# Altium PCB Car Power Supply v2 Big.PcbDoc
Units mm, origin at the board's own origin, x right, y up, seen from the top; angles counter-clockwise.
Board outline 152.4 x 101.6 mm, 2 copper layers (Top Layer, Bottom Layer); 25 components, 12 nets, 53 pads, 4 vias.
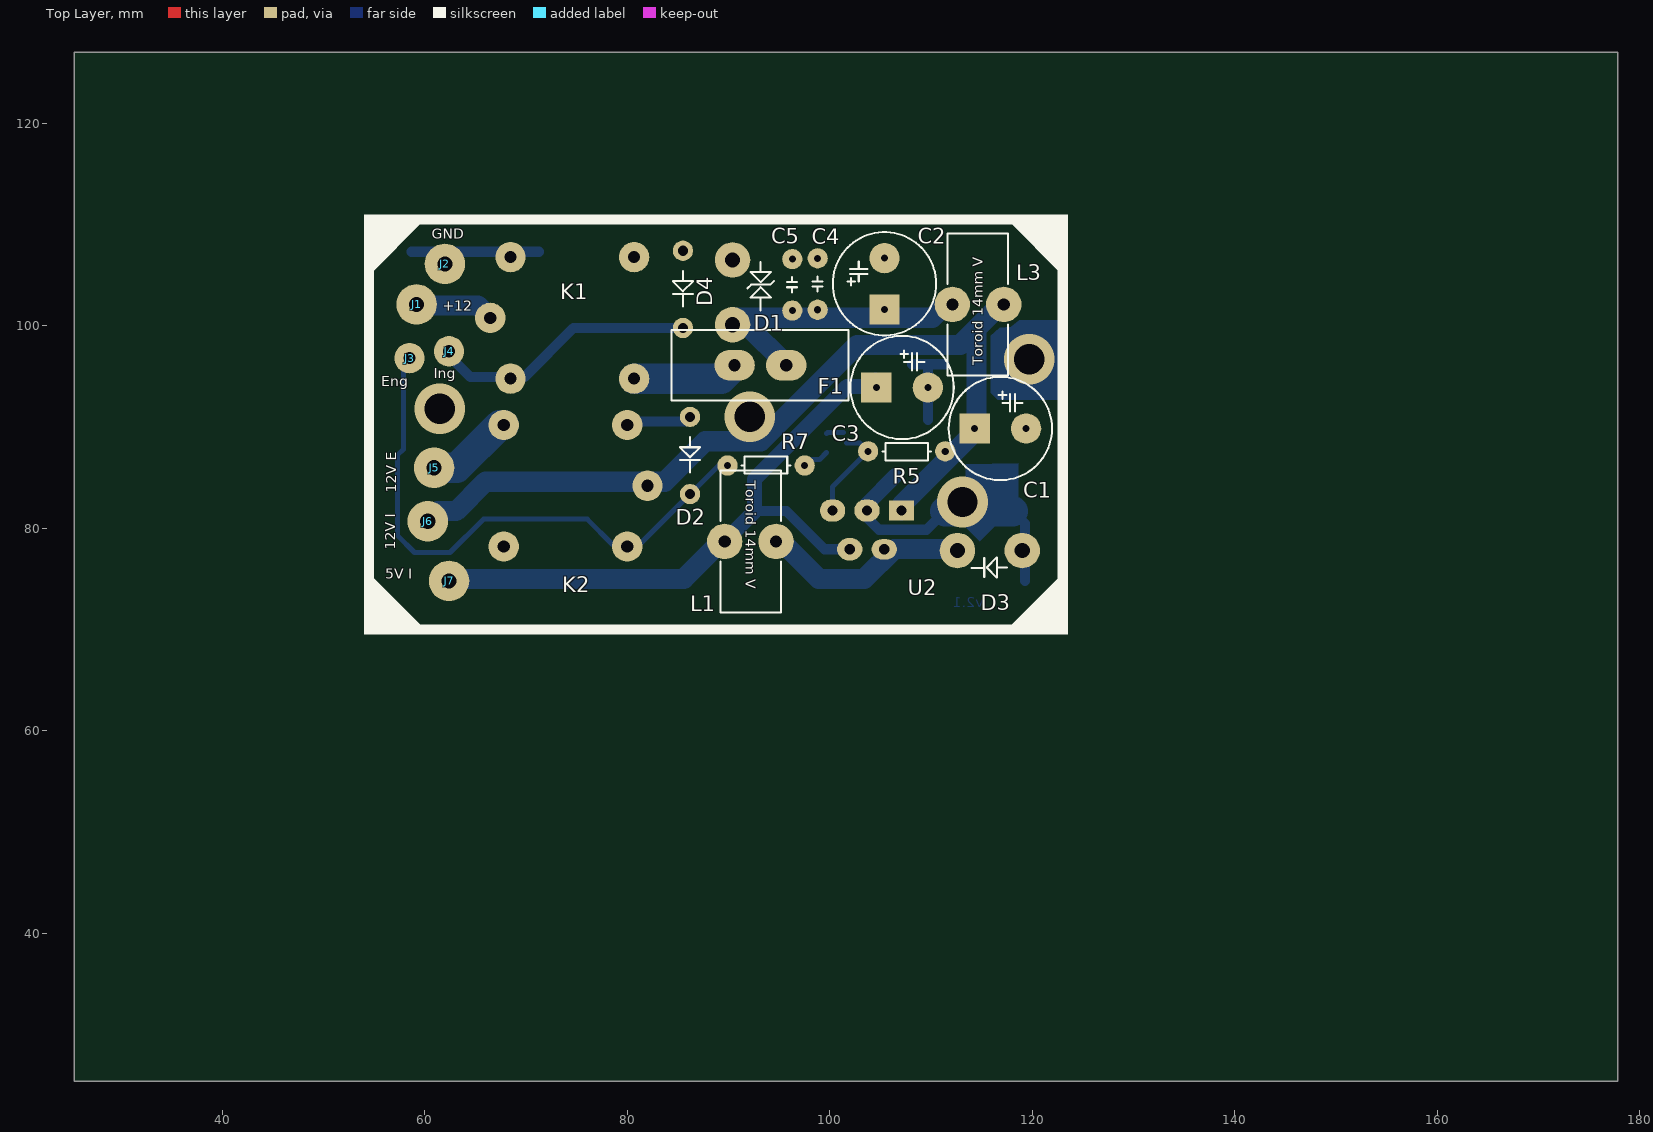
[diagram p0: Top Layer view]
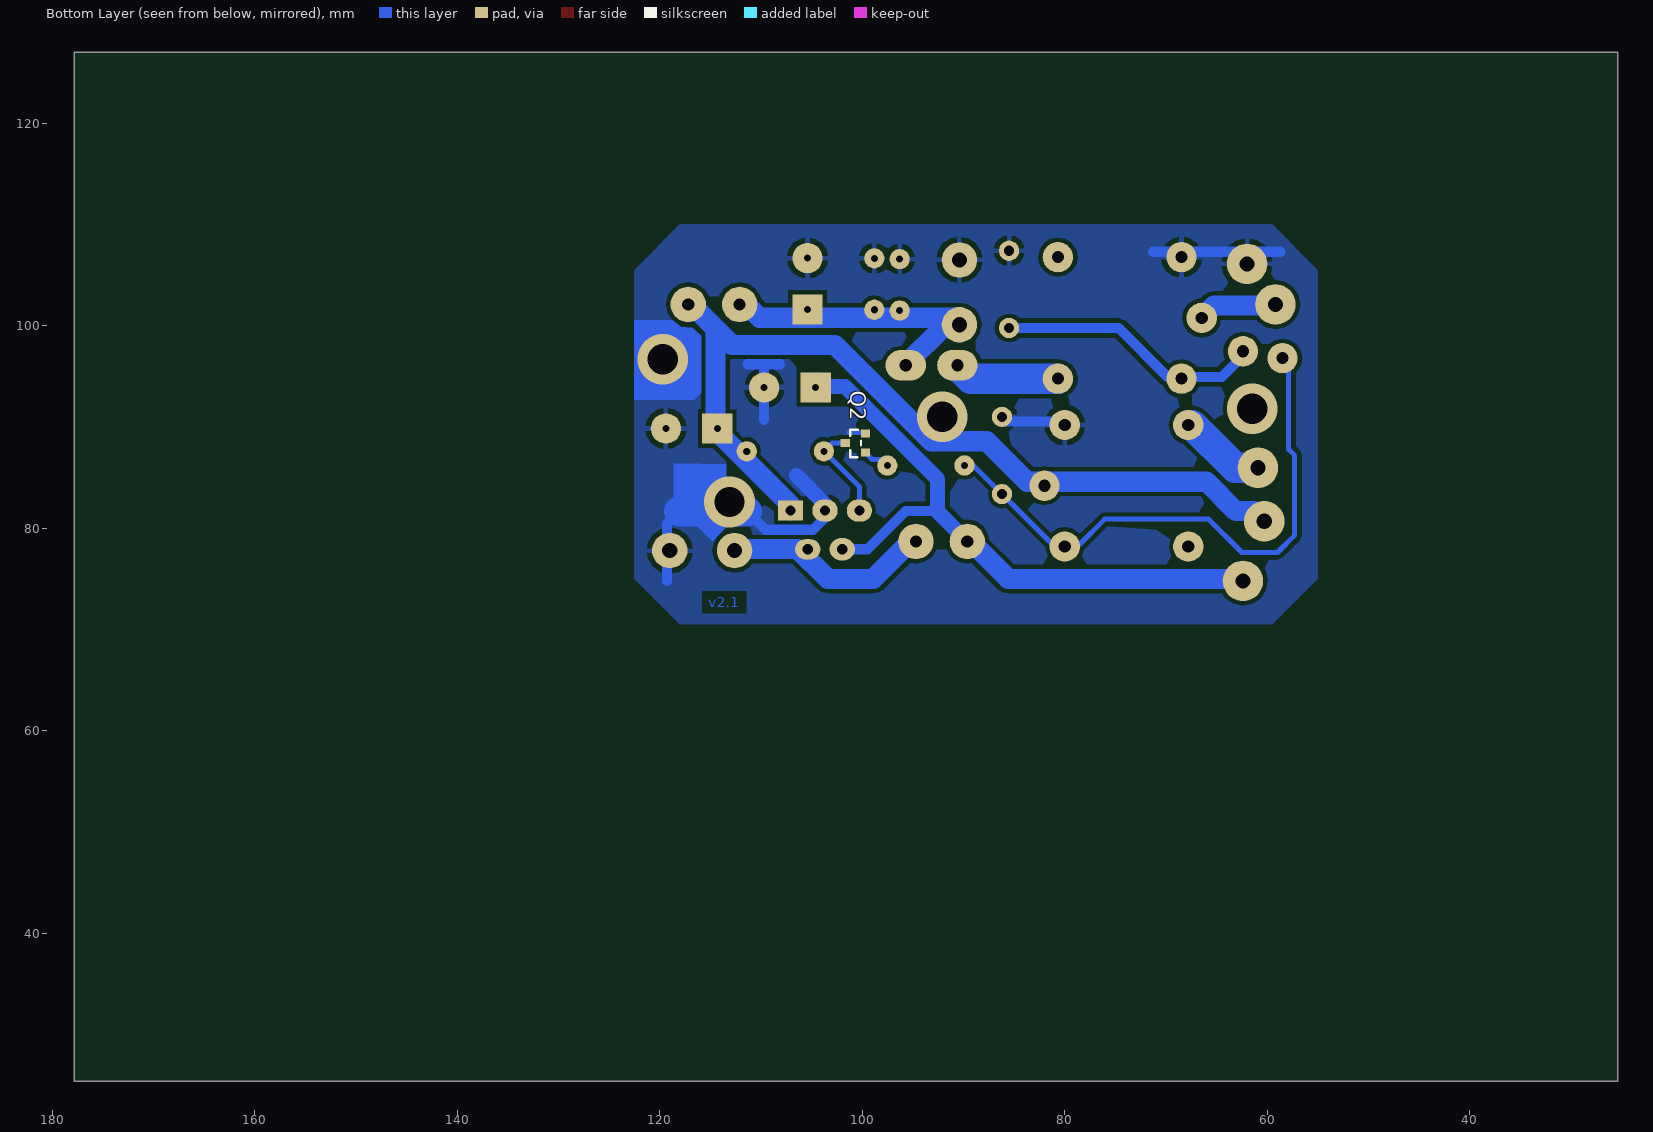
[diagram p1: Bottom Layer view, seen from below]
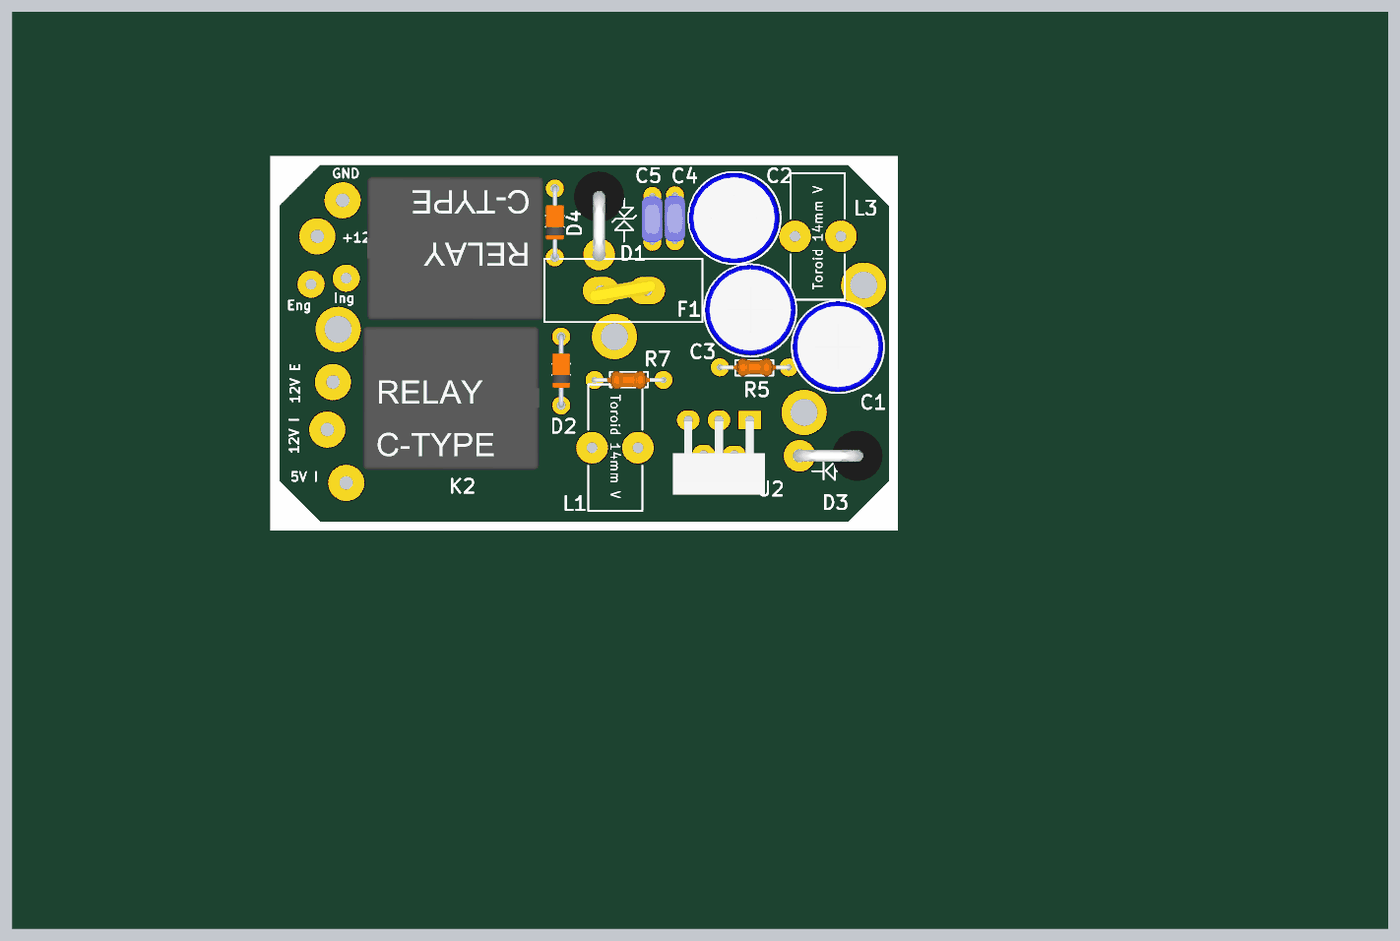
[diagram p2: 3D render of the assembled board from above, using the file's embedded part models]

## Layer stack, top to bottom
Top Solder: solder mask 0.0102, Solder Resist, Dk 3.5
Top Layer: signal copper 0.0356
Dielectric 1: dielectric 0.32, FR-4, Dk 4.8
Bottom Layer: signal copper 0.0356
Bottom Solder: solder mask 0.0102, Solder Resist, Dk 3.5

## Board outline
25.4,25.4 177.8,25.4 177.8,127 25.4,127

## Design rules (kind name [scope] priority, off if disabled: settings)
Clearance [All] p1: gap=0.4
ComponentClearance [All] p1: gap=0 collisioncheckmode=3 verticalgap=0 showdistances=FALSE
PlaneConnect [All] p1: planeconnectstyle=Relief reliefexpansion=0.508 reliefentries=4 reliefconductorwidth=0.4 reliefairgap=0.5
PolygonConnect [All] p1: connectstyle=Relief reliefconductorwidth=0.5 reliefentries=4 polygonreliefangle="90 Angle" airgapwidth=0.5
RoutingVias [All] p1: holewidth=0.711 width=1.27 viastyle="Through Hole" minholewidth=0.711 minwidth=1.27 maxholewidth=0.711 maxwidth=1.27
SolderMaskExpansion [All] p1: expansion=0.102
Width [All] p1: maxlimit=4 minlimit=0.2 preferedwidth=1
27 further rules are at their usual default settings.

## Components (designator, comment, footprint, x,y, rotation, side; value= is the part's Value field where it differs from the comment)
C1 "1000uF" "Cap E p5.08mm D10.2mm (3p)" 114.3,89.85 r0 top
C2 "1000uF" "Cap E p5.08mm D10.2mm (3p)" 105.4,101.6 r90 top
C3 "470mF" "Cap E p5.08mm D10.2mm (3p)" 104.6,93.9 r0 top
C4 "100n" "Cap P5.08MM (3p) disk2" 98.8,101.575 r90 top
C5 "10n" "Cap P5.08MM (3p) disk2" 96.3,101.5 r90 top
D1 "1.5KE20CA" "TVS diode DO-201 V" 90.4,106.5 r270 top
D2 "1N5819" "Diode DO-35" 86.2,91 r270 top
D3 "1N5822" "Diode DO-201 V" 119,77.8 r180 top
D4 "1N5819" "Diode DO-35" 85.5,107.4 r270 top
F1 "A" "Fuse RGE1100" 90.6,96.1 r90 top
J1 "OnePinC" "OnePin 1.2x3"#1 59.2,102.1 r90 top
J2 "OnePinC" "OnePin 1.2x3"#1 62,106.1 r90 top
J3 "OnePinC" "OnePin 1.2x3"#2 58.5,96.8 r90 top
J4 "OnePinC" "OnePin 1.2x3"#2 62.4,97.475 r90 top
J5 "OnePinC" "OnePin 1.2x3"#1 60.93,85.97 r90 top
J6 "OnePinC" "OnePin 1.2x3"#1 60.3,80.7 r90 top
J7 "OnePinC" "OnePin 1.2x3"#1 62.4,74.8 r90 top
K1 "SRA-12VDC-CL" "Relay Type C" 66.475,100.775 r0 top
K2 "SRA-12VDC-CL" "Relay Type C" 82,84.2 r180 top
L1 "Inductor V" "Toroid V D14-W6" 94.7,78.7 r180 top
L3 "Inductor V" "Toroid V D14-W6" 112.1,102.1 r0 top
Q2 "BC817-40" SOT-23 99.675,87.473 r90 bottom
R5 "10 kOm" "Res p7.62 (4p) 0.25w" 111.4,87.6 r180 top
R7 "1 kOm" "Res p7.62 (4p) 0.25w" 89.9,86.2 r0 top
U2 "LM2596T-5.0" "TO220-5 Vertical" 107.075,81.75 r90 top

## Footprints (in the part's own frame and the unit in brackets; to place one, negate y for a bottom-side part, rotate by r counter-clockwise, add the part's x,y. Pads: shape width x height; smd on the part's side, far side on the other; paste and mask are expansions set on the pad)
"Cap E p5.08mm D10.2mm (3p)" [mm] "D 10.2mm; H 17.5mm, Hole: 0.7mm"
  rect 3x3 hole 0.7: 1(0,0)
  round 3 hole 0.7: 2(5.08,0)
  silkscreen extent -2.56,-5.1 7.64,5.1, body extent -2.49,-4.97 7.57,5.08, height 16.53
"Cap P5.08MM (3p) disk2" [mm]
  round 2 hole 0.7: 1(0,0) 2(5.08,0)
  silkscreen extent 1.8,-0.48 3.3,0.53, body extent -0.29,-1.12 5.29,1.16, height 6.04
"Diode DO-35" [mm] "p7.62mm"
  round 2 hole 1: A(0,0) K(7.62,0)
  silkscreen extent 2,-1 5.5,1, body extent -0.32,-1 7.82,1.02, height 2.21
"Diode DO-201 V" [mm] "6p, p15.24mm"
  round 3.5 hole 1.5: A(0,0) K(6.4,0)
  silkscreen extent 1.5,0.67 5,2.67, body extent -2.8,-2.8 7.09,2.8, height 15.69
"Fuse RGE1100" [mm] "Resettable 11A"
  oval 3x4 hole 1.2: 1(0,0) 2(0,-5.1)
  silkscreen extent -3.5,-11.25 3.5,6.25, body extent -1.53,-6.19 1.43,1.39, height 15
"OnePin 1.2x3"#1 [mm]
  round 4 hole 1.5: 1(0,0)
"OnePin 1.2x3"#2 [mm]
  round 3 hole 1.2: 1(0,0)
"Relay Type C" [mm]
  round 3 hole 1.2: 1(14.2,6) 2(0,0) 3(14.2,-6) 4(2,-6) 5(2,6)
  body extent -1.75,-7.95 17.75,7.95, height 15
"Res p7.62 (4p) 0.25w" [mm] "L p7.62; horisontal"
  round 2 hole 0.7: 1(0,0) 2(7.62,0)
  silkscreen extent 1.4,-0.8 6.2,0.9, body extent -0.3,-1 7.8,1, height 2.1
SOT-23 [mm]
  rect 0.8x0.9 smd: 1(0,0) 2(1.875,0) 3(0.95,2)
  silkscreen extent -0.45,0.45 2.27,1.53, body extent -0.57,-0.32 2.43,2.32, height 1.08
"TO220-5 Vertical" [mm]
  rect 2x2.5 hole 1: 1(0,0)
  oval 2x2.5 hole 1: 2(-3.825,1.7)
  oval 2.2x2.5 hole 1: 3(0,3.4) 4(-3.825,5.1) 5(0,6.8)
  body extent -8.24,-1.68 0,8.48, height 22.35
"Toroid V D14-W6" [mm] "10mm Black ring TEC.ORG"
  round 3.5 hole 1.2: 1(0,0) 2(5.08,0)
  silkscreen extent -0.5,-7 5.5,7
"TVS diode DO-201 V" [mm] "6p, p15.24mm"
  round 3.5 hole 1.5: 1(0,0) 2(6.4,0)
  silkscreen extent 0.2,1.47 5,4.07, body extent -2.8,-2.8 7.09,2.8, height 15.69

## Part data
C1 C2 C3: library part "Cap E 1000mF x 25V", "Capacitor"
C4 C5: library part "Cap Ceramic", "Capacitor"
D1: library part "TVS 1.5KE20CA", "1500W Transil (TVS Diode)"
D2 D4: library part "Diode 1N5819", "1 Amp General Purpose Rectifier"
D3: library part "D Shotki 1N5822", "3 Amp Shotki  Diode"
F1: library part Fuse, "Round fuse"
J1 J2 J3 J4 J5 J6 J7: library part "OnePin Connector", "Only pad"
K1 K2: "Single-Pole Dual-Throw Relay"
L1 L3: "Inductor Vertical"
Q2: "NPN 45 V, 500 mA NPN general-purpose transistor"
R5 R7: library part "Res All Types"
U2: "Voltage Regulator"

## Via types
v1: diameter 5, hole 3, Top Layer to Bottom Layer, 4 vias

## Nets (pads, with @x,y where several pads share a name; then routed paths per layer and width w, separated by ;. In a path a pad name is that pad's centre, name@x,y a point inside that pad or via, vN(x,y) a via of type N, cw(c..) or ccw(c..) an arc to the next point about the centre after c; other vN are vias at no path point)
+5V: C3.1 J7.1 L1.2 U2.4 | length 63.1
  Bottom Layer w1: 92.55,81.7 95.7,81.7 99.475,77.925 U2.4
  Bottom Layer w1.5: L1.2@89.445,78.845 89.745,78.845 92.55,81.65 ; 92.55,81.7 92.55,84.85 101.7,94 103.875,94 C3.1@104.5,94.625
  Bottom Layer w2: J7.1@62.4,74.75 62.65,75 85.6,75 L1.2@89.445,78.845
"+12 V RAW": C2.1 C4.1 C5.1 D1.2 F1.2 L3.1 | length 28.6
  Bottom Layer w2: D1.2 91.756,100.1 F1.2@95.731,96.125 ; D1.2@90.7,100.8 110.125,100.8 L3.1@111.65,102.325
+12V: J1.1 K1.2 | length 7
  Bottom Layer w2: J1.1@60,102 65.25,102 K1.2
"+12V ENGINE": J5.1 K2.3 | length 8.6
  Bottom Layer w3: J5.1 63.17,85.97 67.4,90.2 K2.3
"+12V NO NOISE": C1.1 J6.1 K2.2 L3.2 R5.1 U2.1 | length 89.8
  Bottom Layer w2: J6.1 61.3,81.7 63.1,81.7 66,84.6 83.7,84.6 87.7,88.6 93.2,88.6 102.7,98.1 112.875,98.1 L3.2@116.73,101.955 ; U2.1 107.075,82.275 114.475,89.675 114.475,99.7 L3.2@116.73,101.955 ; L3.2@116.73,102.325 L3.2@116.73,101.955
  other v1: 92.1,91
GND: C1.2 C2.2 C3.2 C4.2 C5.2 D1.1 D2.A D3.A D4.A J2.1 K1.5 K2.4 Q2.2 U2.3 | length 58.4
  Bottom Layer w0.5: Q2.2 99.8,89.473 101.373,89.473
  Bottom Layer w1: 58.7,107.3 71.3,107.3 ; K2.4@79.425,90.55 85.75,90.55 D2.A ; U2.3 103.675,81.025 104.85,79.85 107.25,79.85 109.55,79.85 v1@111.4,81.7 ; 108.1,96.2 109.7,96.2 ; 109.7,90.7 109.7,96.2 ; 111.3,96.2 109.7,96.2 ; 118.05,81.7 119.275,80.475 119.275,74.8
  Bottom Layer w1.5: U2.3 103.675,82.375 106.5,85.2
  Bottom Layer w3: v1@111.4,81.7 118.05,81.7
  other v1: 113.1,82.6 119.7,96.7
NetD3_K: D3.K L1.1 U2.2 | length 20.7
  Bottom Layer w2: L1.1@95.15,78.75 98.9,75 103.4,75 106.35,77.95 D3.K@113.025,77.95
NetF1_1: F1.1 K1.3 | length 10.5
  Bottom Layer w3: K1.3 89.275,94.775 F1.1
NetQ2_1: Q2.1 R7.2 | length 2.2
  Bottom Layer w0.5: R7.2@97.72,86.8 99.002,86.8 Q2.1
NetQ2_3: Q2.3 R5.2 U2.5 | length 9.7
  Bottom Layer w0.5: U2.5 100.275,84.095 R5.2 102.957,88.423 Q2.3
"ON ENGINE": D2.K J3.1 K2.5 R7.1 | length 58.2
  Bottom Layer w0.5: J3.1@58.5,97.5 57.9,96.9 57.9,87.8 57.3,87.2 57.3,79.3 59,77.6 62.5,77.6 65.8,80.9 76.05,80.9 78.55,78.4 81.22,78.4 89.62,86.8 R7.1@90.227,86.8
"ON INGITION": D4.K J4.1 K1.4 | length 26.3
  Bottom Layer w1: J4.1@62.188,97.263 64.525,94.925 69.825,94.925 74.68,99.78 D4.K
pads on no net: K1.1 K2.1
copper on no net:
  other v1: 61.5,91.8

## Polygon pours and split planes (outlines as drawn)
GND on Bottom Layer "Top Layer-No Net" (solid, pour order 2): 55,105.5 59.5,110 118,110 122.5,105.5 122.5,75 118,70.5 59.5,70.5 55,75

## Other copper
Bottom Layer:
  region net GND: 115.902,95.336 115.9,99 116.8,99.8 117.9,99.9 118.73,100.55 122.5,100.55 122.5,92.7 116.6,92.7 115.9,93.4
  region net GND: 113.411,86.318 113.4,86.307 113.4,80.1 114.8,78.7 118.6,82.5 118.6,86.4
  text "v2.1" at 115.2,72.2 h1

## Silkscreen, mask and mechanical layers (free items; w line width, h text height)
Top Overlay:
  rectangle: 122.5,70.5 123.5,110
  rectangle: 54,69.5 123.5,70.5
  rectangle: 54,70.5 55,110
  rectangle: 54,110 123.5,111
  region: 122.5,105.5 118,110 122.5,110
  region: 118,70.5 122.5,75 122.5,70.5
  region: 55,75 59.5,70.5 55,70.5
  region: 59.5,110 55,105.5 55,110
  text "GND" at 60.7,108.6 h1
  text "+12" at 61.8,101.5 h1
  text "Ing" at 60.9,94.8 h1
  text "Eng" at 55.7,94 h1
  text "12V E" at 57.2,83.5 h1 r90
  text "12V I" at 57.1,77.9 h1 r90
  text "5V I" at 56.1,75 h1
Drill Drawing:
  text "Drill Drawing." at 55.4,61.4 h1.52
  text ".LEGEND" at 55.8,36 h1.52

## Text inside footprints (layer, text, board x,y; h text height)
L1: Top Overlay "Toroid 14mm V" at 91.7,84.7 h1 r270
L3: Top Overlay "Toroid 14mm V" at 115.1,96.1 h1 r90